# EAGLE board Rolllaeden_Stromversorgung (EAGLE 7.4.0)
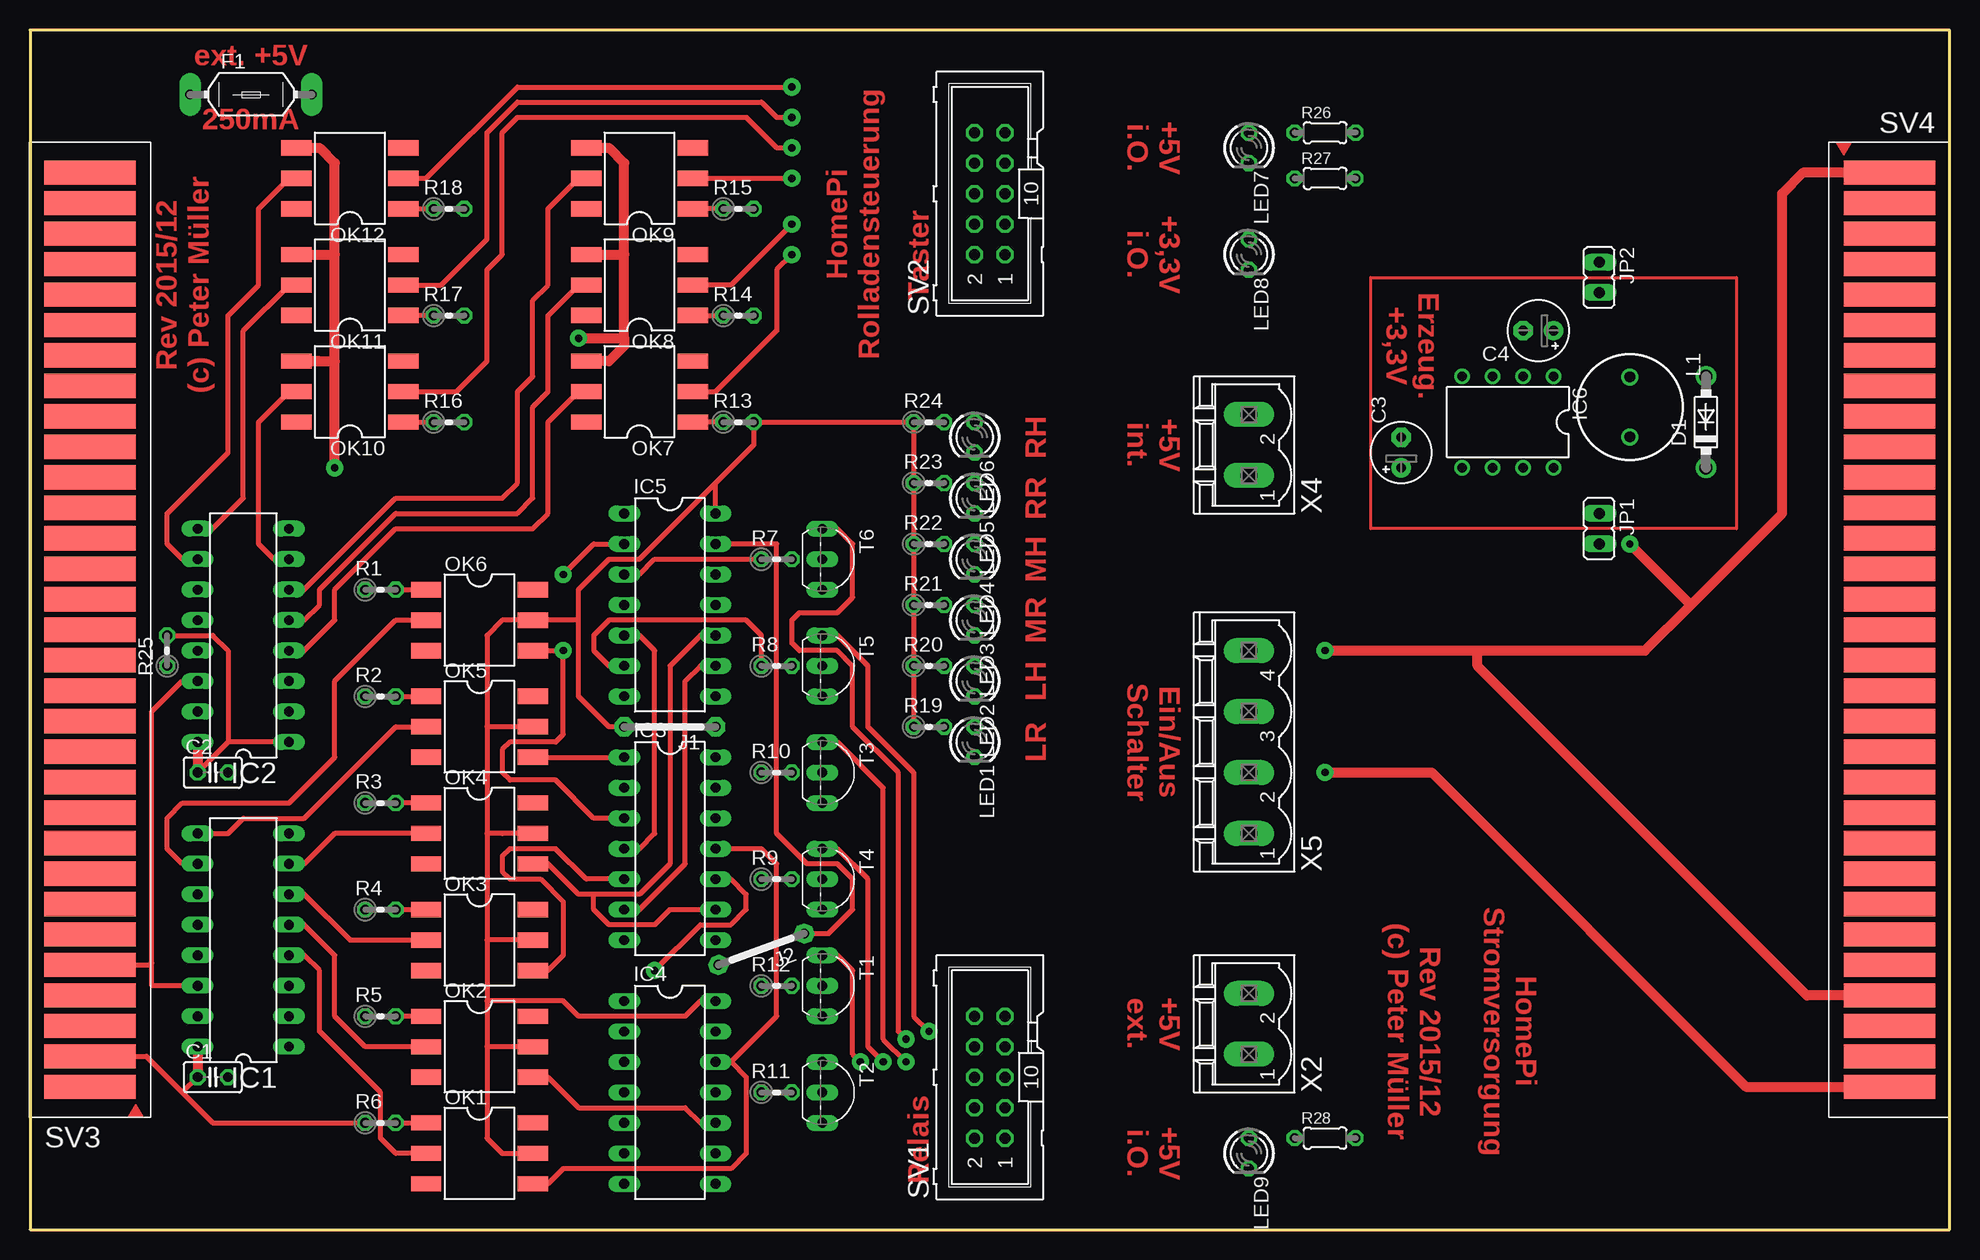
[diagram p0: board, top side]
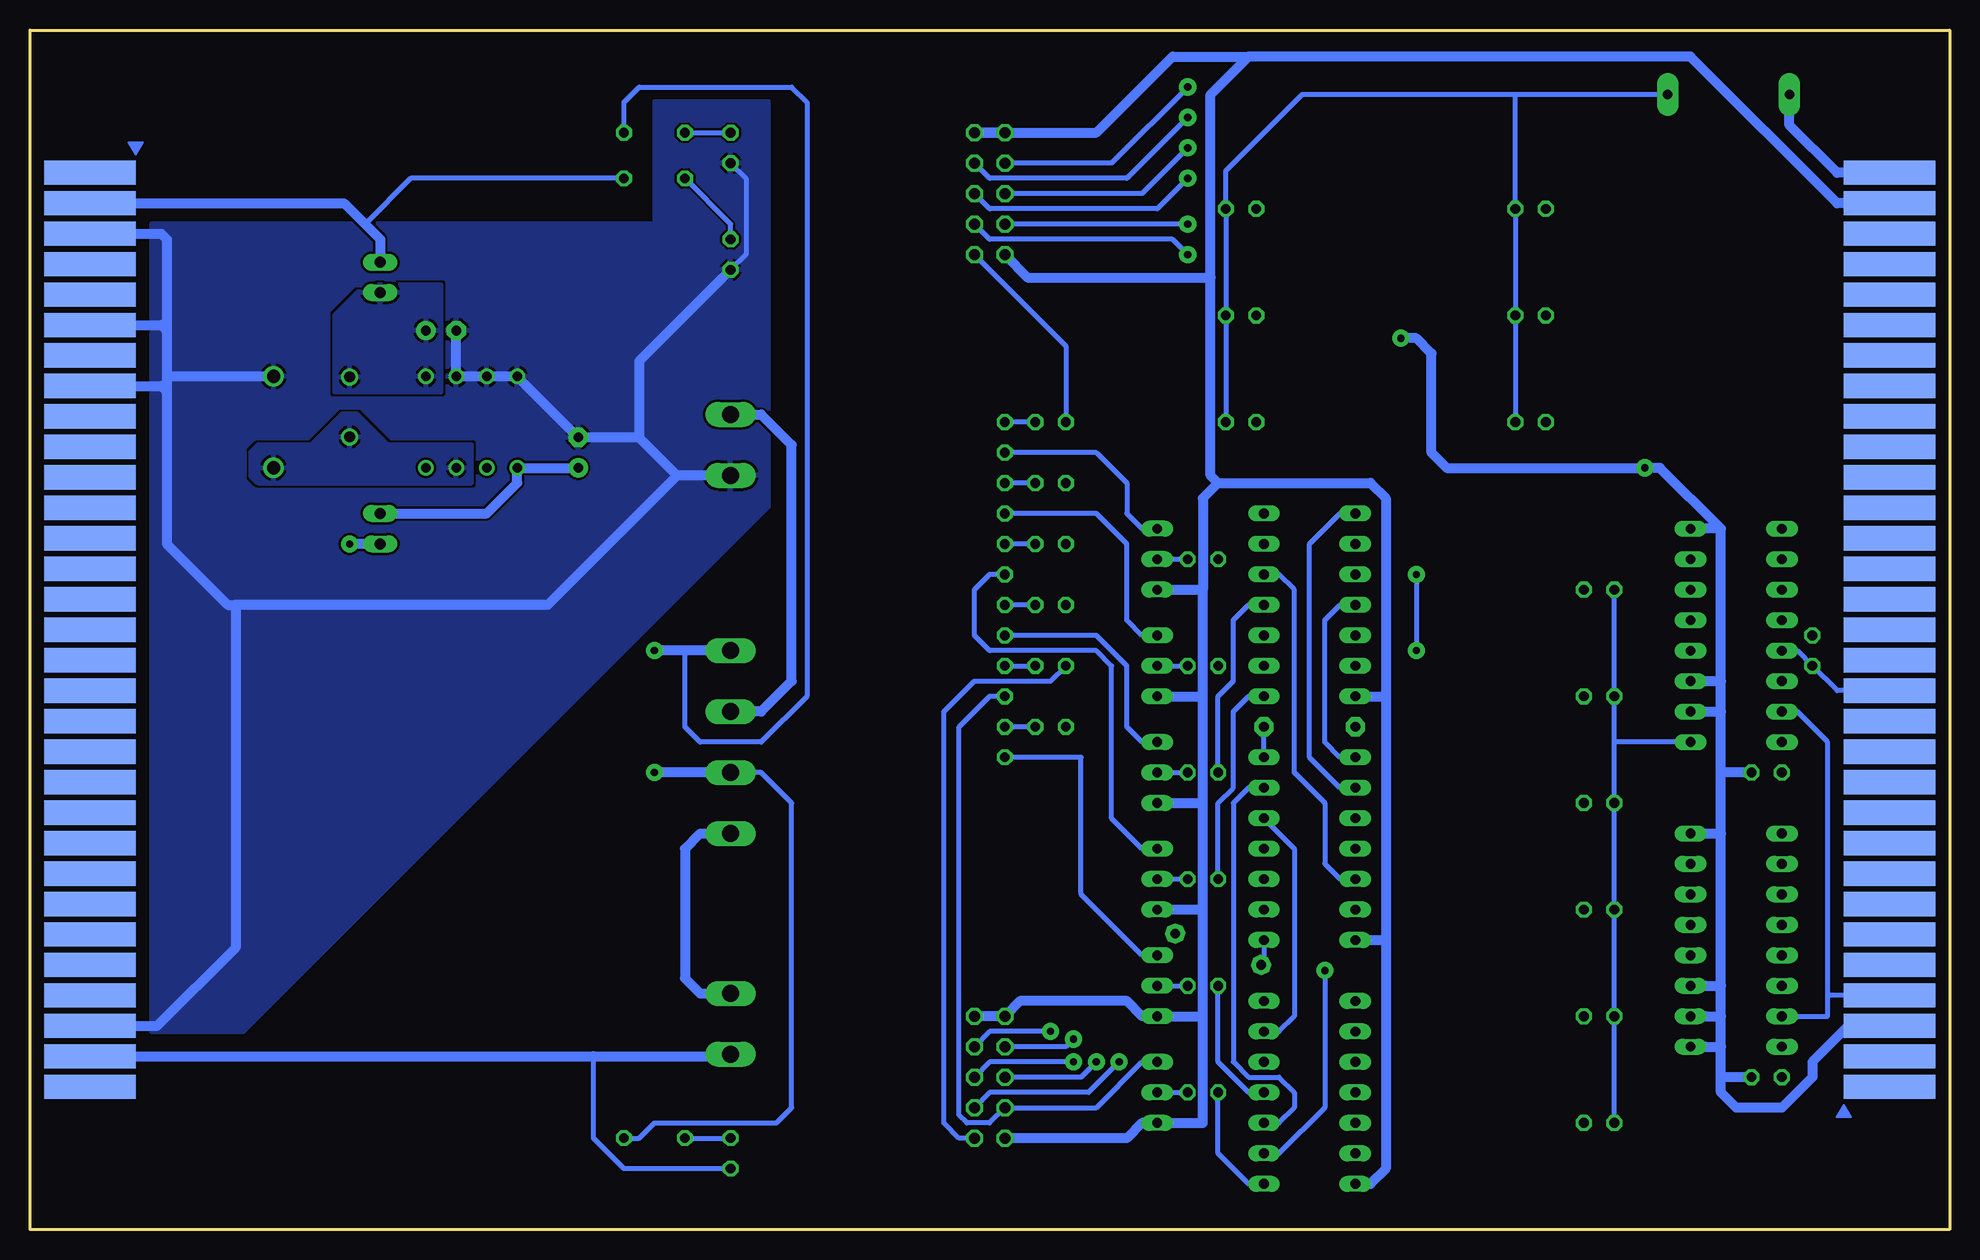
[diagram p1: board, bottom side, seen from below]

Size 160 x 100 mm. Coordinates in mm from the lower left corner, seen from the top.
Outline: 0,0 160,0 160,100 0,100 0,0
Copper layers (1*16): Top 0.035mm / dielectric 1.5mm / Bottom 0.035mm
Design rules "default *": minimum track width 10mil, minimum drill 24mil, track to track 0.2mm, track to pad 0.2mm, pad to pad 0.2mm, via to via 0.2mm, smd to smd 0.2mm, copper to edge 40mil, drill to drill 0.4mm, minimum pad ring 10mil, minimum via ring 8mil, stop-mask expansion 4mil, vias tented up to drill 0mil, thermal gap 10mil
Net classes: 1 gnd: width 0.61 mm

## Footprints (pad centres in the part's own frame; a part is rotated, then mirrored left to right if it is on the bottom)
C025-025X050 = drill 0.813 octagon: 1 -1.27,0; 2 1.27,0
E2,5-5 = drill 0.813 pad 1.6: + -1.27,0 | drill 0.813 pad 1.6 octagon: - 1.27,0
DO41-7.6 = drill 1.1 pad 1.7: A 3.81,0; C -3.81,0
LITTLEFUSE = drill 0.813 pad 1.778 long: 1 -5.08,0; 2 5.08,0
DIL16 = drill 0.813 long: 1 -8.89,-3.81; 2 -6.35,-3.81; 3 -3.81,-3.81; 4 -1.27,-3.81; 5 1.27,-3.81; 6 3.81,-3.81; 7 6.35,-3.81; 8 8.89,-3.81; 9 8.89,3.81; 10 6.35,3.81; 11 3.81,3.81; 12 1.27,3.81; 13 -1.27,3.81; 14 -3.81,3.81; 15 -6.35,3.81; 16 -8.89,3.81
DIL14 = drill 0.813 long: 1 -7.62,-3.81; 2 -5.08,-3.81; 3 -2.54,-3.81; 4 0,-3.81; 5 2.54,-3.81; 6 5.08,-3.81; 7 7.62,-3.81; 8 7.62,3.81; 9 5.08,3.81; 10 2.54,3.81; 11 0,3.81; 12 -2.54,3.81; 13 -5.08,3.81; 14 -7.62,3.81
DIL08 = drill 0.813 pad 1.27: 1 -3.81,-3.81; 2 -1.27,-3.81; 3 1.27,-3.81; 4 3.81,-3.81; 5 3.81,3.81; 6 1.27,3.81; 7 -1.27,3.81; 8 -3.81,3.81
07 = drill 0.813 pad 1.6 octagon: 1 -3.81,0; 2 3.81,0
JP1 = drill 0.914 long: 1 0,-1.27; 2 0,1.27
6000-XXXX-RC = drill 0.9 pad 1.422: 1 -2.5,0; 2 2.5,0
LED3MM = drill 0.813 octagon: A -1.27,0; K 1.27,0
DIL06_SMD = smd 1.27 x 2.54: 1 -2.54,-4.445; 2 0,-4.445; 3 2.54,-4.445; 4 2.54,4.445; 5 0,4.445; 6 -2.54,4.445
0204V = drill 0.813 octagon: 1 -1.27,0; 2 1.27,0
0204/5 = drill 0.813 octagon: 1 -2.54,0; 2 2.54,0
ML10 = drill 0.914 octagon: 1 -5.08,-1.27; 2 -5.08,1.27; 3 -2.54,-1.27; 4 -2.54,1.27; 5 0,-1.27; 6 0,1.27; 7 2.54,-1.27; 8 2.54,1.27; 9 5.08,-1.27; 10 5.08,1.27
PLATINENVERBINDER-31-SMD = smd 7.62 x 2.032 bottom: 1 0,-38.1; 2 0,-35.56; 3 0,-33.02; 4 0,-30.48; 5 0,-27.94; 6 0,-25.4; 7 0,-22.86; 8 0,-20.32; 9 0,-17.78; 10 0,-15.24; 11 0,-12.7; 12 0,-10.16; 13 0,-7.62; 14 0,-5.08; 15 0,-2.54; 16 0,0; 17 0,2.54; 18 0,5.08; 19 0,7.62; 20 0,10.16; 21 0,12.7; 22 0,15.24; 23 0,17.78; 24 0,20.32; 25 0,22.86; 26 0,25.4; 27 0,27.94; 28 0,30.48; 29 0,33.02; 30 0,35.56; 31 0,38.1 | smd 7.62 x 2.032: 1T 0,-38.1; 2T 0,-35.56; 3T 0,-33.02; 4T 0,-30.48; 5T 0,-27.94; 6T 0,-25.4; 7T 0,-22.86; 8T 0,-20.32; 9T 0,-17.78; 10T 0,-15.24; 11T 0,-12.7; 12T 0,-10.16; 13T 0,-7.62; 14T 0,-5.08; 15T 0,-2.54; 16T 0,0; 17T 0,2.54; 18T 0,5.08; 19T 0,7.62; 20T 0,10.16; 21T 0,12.7; 22T 0,15.24; 23T 0,17.78; 24T 0,20.32; 25T 0,22.86; 26T 0,25.4; 27T 0,27.94; 28T 0,30.48; 29T 0,33.02; 30T 0,35.56; 31T 0,38.1
TO92-CBE = drill 0.813 long: B 0,0; C -2.54,0; E 2.54,0
MSTBV2 = drill 1.397 long: 1 -2.54,0; 2 2.54,0
MSTBV4 = drill 1.397 long: 1 -7.62,0; 2 -2.54,0; 3 2.54,0; 4 7.62,0

## Placement (x,y rotation side)
C1  100nF  [C025-025X050]  15.24,12.7 0 top
C2  100nF  [C025-025X050]  15.24,38.1 0 top
C3  22µF 75V  [E2,5-5]  114.3,64.77 90 top
C4  220µF 25V  [E2,5-5]  125.73,74.93 180 top
D1  1N5819-B  [DO41-7.6]  139.7,67.31 90 top
F1  250mA  [LITTLEFUSE]  18.41,94.61 0 top
IC1  PCF8574P  [DIL16]  17.78,24.13 90 top
IC2  PCF8574P  [DIL16]  17.78,49.53 90 top
IC3  74HCT04N  [DIL14]  53.34,31.75 270 top
IC4  74HCT08N  [DIL14]  53.34,11.43 270 top
IC5  74HCT08N  [DIL14]  53.34,52.07 270 top
IC6  LM2574N-3.3  [DIL08]  123.19,67.31 180 top
J1  J7MM  [07]  53.34,41.91 180 top
J2  J7MM  [07]  60.96,23.37 200 top
JP1  [JP1]  130.81,58.42 180 top
JP2  [JP1]  130.81,79.38 180 top
L1  100µH  [6000-XXXX-RC]  133.35,68.58 270 top
LED1  rt 2mA  [LED3MM]  78.74,40.64 270 top
LED2  rt 2mA  [LED3MM]  78.74,45.72 270 top
LED3  rt 2mA  [LED3MM]  78.74,50.8 270 top
LED4  rt 2mA  [LED3MM]  78.74,55.88 270 top
LED5  rt 2mA  [LED3MM]  78.74,60.96 270 top
LED6  rt 2mA  [LED3MM]  78.74,66.04 270 top
LED7  [LED3MM]  101.6,90.17 270 top
LED8  [LED3MM]  101.6,81.28 270 top
LED9  [LED3MM]  101.6,6.35 270 top
OK1  CNY17SMD  [DIL06_SMD]  37.47,6.35 270 top
OK2  CNY17SMD  [DIL06_SMD]  37.47,15.24 270 top
OK3  CNY17SMD  [DIL06_SMD]  37.47,24.13 270 top
OK4  CNY17SMD  [DIL06_SMD]  37.47,33.02 270 top
OK5  CNY17SMD  [DIL06_SMD]  37.47,41.91 270 top
OK6  CNY17SMD  [DIL06_SMD]  37.47,50.8 270 top
OK7  CNY17SMD  [DIL06_SMD]  50.8,69.85 90 top
OK8  CNY17SMD  [DIL06_SMD]  50.8,78.74 90 top
OK9  CNY17SMD  [DIL06_SMD]  50.8,87.63 90 top
OK10  CNY17SMD  [DIL06_SMD]  26.67,69.85 90 top
OK11  CNY17SMD  [DIL06_SMD]  26.67,78.74 90 top
OK12  CNY17SMD  [DIL06_SMD]  26.67,87.63 90 top
R1  330  [0204V]  29.21,53.34 0 top
R2  330  [0204V]  29.21,44.45 0 top
R3  330  [0204V]  29.21,35.56 0 top
R4  330  [0204V]  29.21,26.67 0 top
R5  330  [0204V]  29.21,17.78 0 top
R6  330  [0204V]  29.21,8.89 0 top
R7  4k7  [0204V]  62.23,55.88 0 top
R8  4k7  [0204V]  62.23,46.99 0 top
R9  4k7  [0204V]  62.23,29.21 0 top
R10  4k7  [0204V]  62.23,38.1 0 top
R11  4k7  [0204V]  62.23,11.43 0 top
R12  4k7  [0204V]  62.23,20.32 0 top
R13  330  [0204V]  59.05,67.31 0 top
R14  330  [0204V]  59.05,76.2 0 top
R15  330  [0204V]  59.05,85.09 0 top
R16  330  [0204V]  34.92,67.31 0 top
R17  330  [0204V]  34.92,76.2 0 top
R18  330  [0204V]  34.92,85.09 0 top
R19  1k8  [0204V]  74.93,41.91 0 top
R20  1k8  [0204V]  74.93,46.99 0 top
R21  1k8  [0204V]  74.93,52.07 0 top
R22  1k8  [0204V]  74.93,57.15 0 top
R23  1k8  [0204V]  74.93,62.23 0 top
R24  1k8  [0204V]  74.93,67.31 0 top
R25  10k  [0204V]  11.43,48.26 90 top
R26  1k5  [0204/5]  107.95,91.44 0 top
R27  560  [0204/5]  107.95,87.63 0 top
R28  1k5  [0204/5]  107.95,7.62 0 top
SV1  [ML10]  80.01,12.7 90 top
SV2  [ML10]  80.01,86.36 90 top
SV3  PLATINENVERBINDER-31SMD  [PLATINENVERBINDER-31-SMD]  5,50 0 top
SV4  PLATINENVERBINDER-31SMD  [PLATINENVERBINDER-31-SMD]  155,50 180 top
T1  BC337-25  [TO92-CBE]  66.04,20.32 270 top
T2  BC337-25  [TO92-CBE]  66.04,11.43 270 top
T3  BC337-25  [TO92-CBE]  66.04,38.1 270 top
T4  BC337-25  [TO92-CBE]  66.04,29.21 270 top
T5  BC337-25  [TO92-CBE]  66.04,46.99 270 top
T6  BC337-25  [TO92-CBE]  66.04,55.88 270 top
X2  Power ext., 5V 1A  [MSTBV2]  101.6,17.14 90 top
X4  Power int., 5V 1A  [MSTBV2]  101.6,65.41 90 top
X5  MSTBV4  [MSTBV4]  101.6,40.64 90 top

## Library data of the parts
C1-C4 L1 R26-R28 = rcl
D1 = diode
F1 = fuse; OC_FARNELL: unknown; OC_NEWARK: unknown
IC1 IC2 = micro-philips; MPN: PCF8574PN; OC_FARNELL: 204020; OC_NEWARK: 11N8515
IC3-IC5 = 74xx-eu
IC6 = linear
J1 J2 JP1 JP2 = jumper
LED1-LED9 = led
OK1-OK12 SV3 SV4 = homepi
R1-R25 = resistor
SV1 SV2 = con-harting-ml; OC_FARNELL: unknown; OC_NEWARK: unknown
T1-T6 = transistor
X2 X4 = con-phoenix-508; MPN: MSTBV 2,5/2-GF-5.08; OC_FARNELL: 1792792; OC_NEWARK: 69R9845
X5 = con-phoenix-508; MPN: MSTBV 2,5/4-GF-5.08; OC_FARNELL: 1792794; OC_NEWARK: 69R9847

## Nets
+3,3V: JP2.1 R27.2 SV4.2 SV4.2T
+3,3V_INT_1: C4.+ IC6.1 JP2.2 L1.1
+3V3: C1.1 C2.1 IC1.16 IC2.1 IC2.16 R1.1 R2.1 R3.1 R4.1 R5.1 R6.1 R25.2 SV3.2 SV3.2T
+5V_EXT: R28.2 SV4.31 SV4.31T X5.2
+5V_INT: JP1.2 R26.2 SV4.1 SV4.1T SV4.28 SV4.28T X5.4
GND [gnd]: IC3.7 IC4.7 IC5.7 SV1.2 SV1.9 SV1.10 SV2.2 SV2.9 SV2.10 SV3.30 SV3.30T T1.E T2.E T3.E T4.E T5.E T6.E
GND_EXT: LED9.K SV4.30 SV4.30T X2.1
GND_INT: C3.- C4.- D1.A IC6.2 IC6.3 IC6.4 LED7.K LED8.K SV4.3 SV4.3T SV4.6 SV4.6T SV4.8 SV4.8T SV4.29 SV4.29T X4.1
GPIO.05: IC2.13 R25.1 SV3.14 SV3.14T
LM2574_IN: C3.+ IC6.5 JP1.1
LM2574_OUT: D1.C IC6.7 L1.2
N$1: OK5.1 R2.2
N$2: OK6.1 R1.2
N$3: R9.2 T4.B
N$4: IC3.3 IC5.2 OK6.4
N$5: OK8.2 SV2.4
N$6: IC5.3 R7.1
N$7: IC3.4 IC5.5
N$8: R10.2 T3.B
N$9: R8.2 T5.B
N$10: IC3.2 IC5.1
N$11: IC3.1 IC5.4 OK5.4
N$12: IC5.6 R8.1
N$13: OK2.1 R5.2
N$14: OK1.1 R6.2
N$15: LED1.A R19.2
N$16: IC1.9 OK5.2
N$17: OK4.1 R3.2
N$18: OK3.1 R4.2
N$19: OK7.1 R13.1
N$20: OK8.1 R14.1
N$21: OK7.2 SV2.3
N$22: IC3.9 IC5.10 OK4.4
N$23: IC3.5 IC5.12 OK3.4
N$24: IC3.8 J2.2
N$25: IC3.6 IC5.9
N$26: R7.2 T6.B
N$27: R11.2 T2.B
N$28: R12.2 T1.B
N$29: LED1.K SV1.3 T1.C
N$30: IC5.8 R9.1
N$31: IC5.11 R10.1
N$32: IC1.7 OK4.2
N$33: IC1.6 OK3.2
N$34: IC3.13 IC4.10 OK2.4
N$35: IC3.11 IC4.12 OK1.4
N$36: IC1.5 OK2.2
N$37: IC1.4 OK1.2
N$38: IC3.12 IC4.13
N$39: IC3.10 IC4.9
N$40: LED2.K SV1.4 T2.C
N$41: LED3.K SV1.5 T3.C
N$42: LED4.K SV1.6 T4.C
N$43: LED5.K SV1.7 T5.C
N$44: IC4.8 R11.1
N$45: IC4.11 R12.1
N$46: LED6.K SV1.8 T6.C
N$47: IC2.4 OK7.5
N$48: IC2.5 OK8.5
N$49: OK9.2 SV2.5
N$50: IC2.6 OK9.5
N$51: IC2.7 OK10.5
N$52: OK9.1 R15.1
N$53: OK10.1 R16.1
N$54: OK10.2 SV2.6
N$55: OK11.2 SV2.7
N$56: IC2.9 OK11.5
N$57: IC2.10 OK12.5
N$58: OK11.1 R17.1
N$59: OK12.1 R18.1
N$60: OK12.2 SV2.8
N$61: LED2.A R20.2
N$62: LED3.A R21.2
N$63: LED4.A R22.2
N$64: LED5.A R23.2
N$65: LED6.A R24.2
N$66: IC5.13 J2.1
N$67: IC3.14 J1.1
N$68: F1.1 SV3.31 SV3.31T
N$69: X5.1
N$71: LED7.A R26.1
N$72: LED8.A R27.1
N$73: LED9.A R28.1
N$75: X4.2 X5.3
N$99: IC1.10 OK6.2
PI_GND [gnd]: C1.2 C2.2 IC1.1 IC1.2 IC1.3 IC1.8 IC2.2 IC2.3 IC2.8 OK7.4 OK8.4 OK9.4 OK10.4 OK11.4 OK12.4 SV3.3 SV3.3T
SCL: IC1.14 IC2.14 SV3.5 SV3.5T
SDA: IC1.15 IC2.15 SV3.4 SV3.4T
VCC: F1.2 IC4.14 IC5.14 J1.2 OK1.5 OK2.5 OK3.5 OK4.5 OK5.5 OK6.5 R13.2 R14.2 R15.2 R16.2 R17.2 R18.2 R19.1 R20.1 R21.1 R22.1 R23.1 R24.1 SV1.1 SV2.1

## Tracks (layer width: path | path; a pad name or v marks a point on that pad's centre or on a via)
+3,3V
  Bottom 0.406: R27.2 128.27,87.63 132.08,83.82
  Bottom 0.813: SV4.2T 133.82,85.56 132.08,83.82 130.81,82.55 JP2.1
+3,3V_INT_1
  pour Bottom: 134.62,69.85 125.73,69.85 125.73,78.74 132.08,78.74 134.62,76.2
+3V3
  Top 0.406: R6.1 15.24,8.89 12.7,11.43 | IC2.1 16.51,40.64 | 16.51,40.64 C2.1 | 12.7,11.43 9.69,14.44 SV3.2T | C1.1 12.7,11.43 | R25.2 15.24,49.53 16.51,48.26 16.51,40.64
  Top 0.813: IC2.16 C2.1 | IC1.16 C1.1
  Bottom 0.406: R6.1 R5.1 R4.1 R3.1 27.94,40.64 | 27.94,40.64 R2.1 R1.1 | IC2.1 27.94,40.64
+5V_EXT  (via drill 0.6 pad 1.42)
  Top 0.813: SV4.31 143.04,11.9 116.84,38.1 v107.95,38.1
  Bottom 0.406: X5.2 99.06,38.1 96.52,35.56 96.52,10.16 97.79,8.89 107.95,8.89 109.22,7.62 R28.2
  Bottom 0.813: X5.2 v107.95,38.1
+5V_INT  (via drill 0.6 pad 1.42)
  Top 0.813: 138.43,52.07 134.62,48.26 120.65,48.26 | 138.43,52.07 146.05,59.69 146.05,86.36 147.79,88.1 SV4.1T | v133.35,57.15 138.43,52.07 | SV4.28T 148.12,19.52 120.65,46.99 120.65,48.26 | v107.95,48.26 120.65,48.26
  Bottom 0.406: R26.2 110.49,93.98 109.22,95.25 96.52,95.25 95.25,93.98 95.25,44.45 99.06,40.64 104.14,40.64 105.41,41.91 105.41,48.26
  Bottom 0.813: JP1.2 v133.35,57.15 | X5.4 105.41,48.26 v107.95,48.26
GND
  Bottom 0.813: SV2.10 SV2.9 71.12,91.44 64.77,97.79 58.42,97.79 | T6.E 62.23,53.34 | T5.E 62.23,44.45 | 62.23,44.45 62.23,53.34 | T3.E 62.23,35.56 | 62.23,35.56 62.23,44.45 | T4.E 62.23,26.67 | 62.23,26.67 62.23,35.56 | 62.23,17.78 T1.E 67.31,17.78 68.58,19.05 77.47,19.05 SV1.10 SV1.9 | 62.23,17.78 62.23,26.67 | 62.23,17.78 62.23,8.89 T2.E 67.31,8.89 68.58,7.62 SV1.2 | IC3.7 46.99,24.13 | 46.99,24.13 46.99,5.08 48.26,3.81 IC4.7 | IC5.7 46.99,44.45 | 46.99,44.45 46.99,24.13 | 58.42,97.79 21.59,97.79 9.36,85.56 SV3.30T | 60.96,62.23 62.23,60.96 62.23,53.34 | 60.96,62.23 48.26,62.23 46.99,60.96 46.99,44.45 | 60.96,62.23 61.59,62.87 61.59,79.38 | 61.59,79.38 61.59,94.61 58.42,97.79 | SV2.2 76.83,79.38 61.59,79.38
GND_EXT
  Bottom 0.406: LED9.K 110.49,5.08 113.03,7.62 113.03,14.44
  Bottom 0.813: SV4.30 113.03,14.44 101.77,14.44 X2.1
GND_INT
  Bottom 0.406: LED7.K 100.33,87.63 100.33,81.28 LED8.K
  Bottom 0.813: 142.88,52.07 116.84,52.07 106.05,62.87 | 142.88,52.07 143.51,52.07 148.59,57.15 148.59,69.85 | 142.88,52.07 142.88,23.5 149.39,16.98 SV4.29T | SV4.3T 149.06,83.02 148.59,82.55 148.59,74.93 | 148.59,74.93 148.59,71.12 | 148.59,71.12 148.59,69.85 | SV4.8T 149.06,70.32 148.59,69.85 | SV4.6T 149.06,75.4 148.59,74.93 | X4.1 106.05,62.87 | 106.05,62.87 109.22,66.04 | 109.22,66.04 C3.- IC6.4 IC6.3 IC6.2 C4.- | LED8.K 109.22,72.39 109.22,66.04 | D1.A 148.59,71.12
  pour Bottom (rank 6): 149.86,83.82 149.86,16.51 142.24,16.51 98.42,60.33 98.42,93.98 107.95,93.98 107.95,83.82
GPIO.05
  Bottom 0.406: IC2.13 12.7,48.26 R25.1 9.36,44.92 SV3.14T
LM2574_IN
  Bottom 0.813: JP1.1 121.92,59.69 119.38,62.23 IC6.5 C3.+
LM2574_OUT
  pour Bottom: 140.97,62.23 123.19,62.23 123.19,65.41 130.18,65.41 132.72,67.94 133.99,67.94 136.53,65.41 140.97,65.41 141.6,64.77 141.6,62.87
N$1
  Top 0.406: R2.2 OK5.1
N$2
  Top 0.406: R1.2 OK6.1
N$3
  Bottom 0.406: T4.B R9.2
N$4  (via drill 0.6 pad 1.42)
  Top 0.406: OK6.4 v44.45,48.26 44.45,41.27 43.81,40.64 40.01,40.64 39.37,40.01 39.37,38.1 40.01,37.47 43.81,37.47 46.99,34.29 IC3.3 | v44.45,54.61 46.99,57.15 IC5.2
  Bottom 0.406: v44.45,54.61 v44.45,48.26
N$5  (via drill 0.6 pad 1.42)
  Top 0.406: v63.5,83.82 58.42,78.74 OK8.2
  Bottom 0.406: v63.5,83.82 SV2.4
N$6
  Top 0.406: IC5.3 50.8,54.61 52.07,55.88 R7.1
N$7
  Top 0.406: IC3.4 50.8,31.75 52.07,33.02 52.07,48.26 50.8,49.53 IC5.5
N$8
  Bottom 0.406: T3.B R10.2
N$9
  Bottom 0.406: T5.B R8.2
N$10
  Bottom 0.406: IC3.2 50.8,36.83 53.34,39.37 53.34,57.15 50.8,59.69 IC5.1
N$11
  Top 0.406: OK5.4 IC3.1
  Bottom 0.406: IC3.1 50.8,39.37 52.07,40.64 52.07,50.8 50.8,52.07 IC5.4
N$12
  Top 0.406: R8.1 60.96,49.53 59.69,50.8 48.26,50.8 46.99,49.53 46.99,48.26 48.26,46.99 IC5.6
N$13
  Top 0.406: OK2.1 R5.2
N$14
  Top 0.406: R6.2 OK1.1
N$15
  Bottom 0.406: R19.2 LED1.A
N$16
  Top 0.406: IC1.9 16.51,33.02 17.78,34.29 22.86,34.29 30.48,41.91 OK5.2
N$17
  Top 0.406: OK4.1 R3.2
N$18
  Top 0.406: R4.2 OK3.1
N$19
  Top 0.406: R13.1 OK7.1
N$20
  Top 0.406: OK8.1 R14.1
N$21  (via drill 0.6 pad 1.42)
  Top 0.406: OK7.2 57.15,69.85 62.23,74.93 62.23,80.01 v63.5,81.28
  Bottom 0.406: SV2.3 80.01,82.55 64.77,82.55 v63.5,81.28
N$22
  Top 0.406: IC3.9 53.34,26.67 52.07,25.4 48.26,25.4 46.99,26.67 46.99,27.94 | IC5.10 55.88,49.53 53.34,46.99 53.34,30.48 50.8,27.94 46.99,27.94 | 46.99,27.94 45.72,27.94 43.18,30.48 OK4.4
N$23
  Top 0.406: IC3.5 46.35,29.21 43.81,31.75 40.01,31.75 39.37,31.11 39.37,29.84 40.01,29.21 42.55,29.21 44.45,27.3 44.45,22.86 43.18,21.59 OK3.4
  Bottom 0.406: IC3.5 50.8,29.21 52.07,30.48 52.07,35.56 54.61,38.1 54.61,53.34 55.88,54.61 IC5.12
N$24
  Bottom 0.406: IC3.8 57.15,22.3 J2.2
N$25
  Top 0.406: IC3.6 50.8,26.67 54.61,30.48 54.61,45.72 55.88,46.99 IC5.9
N$26
  Bottom 0.406: T6.B R7.2
N$27
  Bottom 0.406: T2.B R11.2
N$28
  Bottom 0.406: T1.B R12.2
N$29  (via drill 0.6 pad 1.42)
  Top 0.406: T1.C 67.31,22.86 68.58,21.59 68.58,14.61 v69.22,13.97
  Bottom 0.406: T1.C 67.31,22.86 72.39,27.94 72.39,39.37 LED1.K | v69.22,13.97 71.75,11.43 80.01,11.43 SV1.3
N$30
  Bottom 0.406: R9.1 60.96,35.56 59.69,36.83 59.69,43.18 58.42,44.45 IC5.8
N$31
  Bottom 0.406: R10.1 60.96,44.45 59.69,45.72 59.69,50.8 58.42,52.07 IC5.11
N$32
  Top 0.406: OK4.2 25.4,33.02 22.86,30.48 IC1.7
N$33
  Top 0.406: IC1.6 22.86,27.94 26.67,24.13 OK3.2
N$34
  Top 0.406: OK2.4 43.18,12.7 45.72,10.16 54.61,10.16 55.88,8.89 IC4.10
  Bottom 0.406: IC3.13 58.42,36.83 59.69,35.56 59.69,13.97 58.42,12.7 55.88,12.7 54.61,11.43 54.61,10.16 55.88,8.89 IC4.10
N$35
  Top 0.406: 58.42,13.97 62.23,17.78 62.23,30.48 60.96,31.75 IC3.11 | IC4.12 58.42,13.97 | 58.42,13.97 59.69,12.7 59.69,6.35 58.42,5.08 44.45,5.08 43.18,3.81 OK1.4
N$36
  Top 0.406: OK2.2 27.94,15.24 25.4,17.78 25.4,22.86 22.86,25.4 IC1.5
N$37
  Top 0.406: OK1.2 30.48,6.35 29.21,7.62 29.21,11.43 24.13,16.51 24.13,21.59 22.86,22.86 IC1.4
N$38
  Bottom 0.406: IC3.12 54.61,31.75 54.61,17.78 55.88,16.51 IC4.13
N$39  (via drill 0.6 pad 1.42)
  Top 0.406: v52.07,21.59 55.88,25.4 58.42,25.4 59.69,26.67 59.69,27.94 58.42,29.21 IC3.10
  Bottom 0.406: v52.07,21.59 52.07,10.16 55.88,6.35 IC4.9
N$40
  Bottom 0.406: T2.C 67.31,13.97 71.12,10.16 SV1.4 80.01,8.89 81.92,8.89 82.55,9.53 82.55,41.91 80.01,44.45 LED2.K
N$41  (via drill 0.6 pad 1.42)
  Top 0.406: T3.C 67.31,40.64 71.12,36.83 71.12,15.88 v73.03,13.97
  Bottom 0.406: T3.C 67.31,40.64 68.58,41.91 68.58,46.99 71.12,49.53 LED3.K | v73.03,13.97 80.01,13.97 SV1.5
N$42  (via drill 0.6 pad 1.42)
  Top 0.406: T4.C 67.31,31.75 69.85,29.21 69.85,15.24 v71.12,13.97
  Bottom 0.406: T4.C 67.31,31.75 69.85,34.29 69.85,46.99 71.12,48.26 80.01,48.26 81.28,49.53 81.28,53.34 80.01,54.61 LED4.K | v71.12,13.97 72.39,12.7 SV1.6
N$43  (via drill 0.6 pad 1.42)
  Top 0.406: T5.C 67.31,49.53 69.85,46.99 69.85,41.91 73.66,38.1 73.66,17.78 v74.93,16.51
  Bottom 0.406: T5.C 67.31,49.53 68.58,50.8 68.58,57.15 71.12,59.69 LED5.K | v74.93,16.51 80.01,16.51 SV1.7
N$44
  Bottom 0.406: IC4.8 58.42,3.81 60.96,6.35 R11.1
N$45
  Bottom 0.406: IC4.11 58.42,11.43 60.96,13.97 R12.1
N$46  (via drill 0.6 pad 1.42)
  Top 0.406: T6.C 67.31,58.42 68.58,57.15 68.58,52.7 67.31,51.44 64.14,51.44 63.5,50.8 63.5,48.9 64.14,48.26 67.31,48.26 68.58,46.99 68.58,41.91 72.39,38.1 72.39,16.51 v73.03,15.88
  Bottom 0.406: T6.C 67.31,58.42 68.58,59.69 68.58,62.23 71.12,64.77 LED6.K | SV1.8 73.66,15.24 v73.03,15.88
N$47
  Top 0.406: IC2.4 22.86,48.26 25.4,50.8 25.4,53.34 30.48,58.42 41.91,58.42 43.18,59.69 43.18,67.31 45.72,69.85 OK7.5
N$48
  Top 0.406: IC2.5 22.86,50.8 24.13,52.07 24.13,53.34 30.48,59.69 40.64,59.69 41.91,60.96 41.91,68.58 43.18,69.85 43.18,76.2 45.72,78.74 OK8.5
N$49  (via drill 0.6 pad 1.42)
  Top 0.406: OK9.2 v63.5,87.63
  Bottom 0.406: SV2.5 80.01,85.09 66.04,85.09 v63.5,87.63
N$50
  Top 0.406: IC2.6 22.86,53.34 30.48,60.96 39.37,60.96 40.64,62.23 40.64,69.85 41.91,71.12 41.91,77.47 43.18,78.74 43.18,85.09 45.72,87.63 OK9.5
N$51
  Top 0.406: IC2.7 20.32,55.88 19.05,57.15 19.05,67.31 21.59,69.85 OK10.5
N$52
  Top 0.406: R15.1 OK9.1
N$53
  Top 0.406: OK10.1 R16.1
N$54  (via drill 0.6 pad 1.42)
  Top 0.406: OK10.2 35.56,69.85 38.1,72.39 38.1,80.01 39.37,81.28 39.37,91.44 40.64,92.71 59.69,92.71 62.23,90.17 v63.5,90.17
  Bottom 0.406: v63.5,90.17 67.31,86.36 SV2.6
N$55  (via drill 0.6 pad 1.42)
  Top 0.406: OK11.2 34.29,78.74 38.1,82.55 38.1,91.44 40.64,93.98 60.96,93.98 62.23,92.71 v63.5,92.71
  Bottom 0.406: SV2.7 80.01,87.63 68.58,87.63 v63.5,92.71
N$56
  Top 0.406: IC2.9 15.24,58.42 17.78,60.96 17.78,74.93 21.59,78.74 OK11.5
N$57
  Top 0.406: IC2.10 12.7,55.88 11.43,57.15 11.43,59.69 16.51,64.77 16.51,76.2 19.05,78.74 19.05,85.09 21.59,87.63 OK12.5
N$58
  Top 0.406: R17.1 OK11.1
N$59
  Top 0.406: OK12.1 R18.1
N$60  (via drill 0.6 pad 1.42)
  Top 0.406: OK12.2 33.02,87.63 40.64,95.25 v63.5,95.25
  Bottom 0.406: v63.5,95.25 69.85,88.9 SV2.8
N$61
  Bottom 0.406: LED2.A R20.2
N$62
  Bottom 0.406: R21.2 LED3.A
N$63
  Bottom 0.406: R22.2 LED4.A
N$64
  Bottom 0.406: R23.2 LED5.A
N$65
  Bottom 0.406: R24.2 LED6.A
N$66
  Top 0.406: J2.1 66.58,24.67 68.58,26.67 68.58,29.21 67.31,30.48 64.77,30.48 62.23,33.02 62.23,57.15 IC5.13
N$67
  Bottom 0.406: IC3.14 J1.1
N$68
  Bottom 0.813: SV3.31T 9.36,88.1 13.34,92.08 F1.1
N$69
  Bottom 0.813: X5.1 104.14,33.02 105.41,31.75 105.41,20.95 104.14,19.68 101.6,19.68
N$71
  Bottom 0.406: R26.1 LED7.A
N$72
  Bottom 0.406: LED8.A 101.6,83.82 R27.1
N$73
  Bottom 0.406: R28.1 LED9.A
N$74
  Top 0.254: 142.24,58.42 111.76,58.42 111.76,79.38 142.24,79.38 142.24,58.42
N$75
  Bottom 0.813: X5.3 99.06,43.18 96.52,45.72 96.52,65.41 99.06,67.94 X4.2
N$99
  Top 0.406: IC1.10 12.7,30.48 11.43,31.75 11.43,34.29 12.7,35.56 21.59,35.56 25.4,39.37 25.4,45.72 30.48,50.8 OK6.2
PI_GND  (via drill 0.6 pad 1.42)
  Top 0.813: OK9.4 48.26,90.17 49.53,88.9 49.53,81.28 | OK12.4 24.13,90.17 25.4,88.9 25.4,81.28 | 24.13,72.39 OK10.4 25.4,72.39 | 49.53,74.3 49.53,81.28 | v25.4,63.5 25.4,72.39 | 25.4,72.39 25.4,81.28 | OK8.4 49.53,81.28 | OK11.4 25.4,81.28 | v45.72,74.3 49.53,74.3 | 49.53,74.3 49.53,73.66 48.26,72.39 OK7.4
  Bottom 0.813: 19.05,12.7 19.05,15.24 | 19.05,15.24 19.05,17.78 | 19.05,17.78 19.05,20.32 | 19.05,20.32 19.05,33.02 | 19.05,33.02 19.05,38.1 | 19.05,38.1 19.05,43.18 | 19.05,43.18 19.05,45.72 | 19.05,45.72 19.05,58.42 | 20.32,15.24 IC1.1 19.05,15.24 | 20.32,17.78 IC1.2 19.05,17.78 | 20.32,20.32 IC1.3 19.05,20.32 | 20.32,43.18 IC2.2 19.05,43.18 | C2.2 19.05,38.1 | 19.05,12.7 19.05,11.43 17.78,10.16 13.97,10.16 11.43,12.7 11.43,13.97 8.42,16.98 SV3.3T | C1.2 19.05,12.7 | 19.05,58.42 24.13,63.5 v25.4,63.5 41.91,63.5 43.18,64.77 43.18,73.03 44.45,74.3 v45.72,74.3 | IC2.3 19.05,45.72 | IC1.8 19.05,33.02 | 19.05,58.42 IC2.8
SCL
  Top 0.406: IC1.14 10.16,20.32 10.16,22.23 | 10.16,22.23 10.16,43.18 12.7,45.72 IC2.14 | SV3.5T 9.99,22.06 10.16,22.23
SDA
  Bottom 0.406: IC1.15 10.16,17.78 10.16,19.68 | 10.16,19.68 10.16,40.64 12.7,43.18 IC2.15 | SV3.4T 9.99,19.52 10.16,19.68
VCC
  Top 0.406: R19.1 R20.1 R21.1 R22.1 R23.1 R24.1 R13.2 60.33,65.41 57.15,62.23 | 45.72,50.8 OK6.5 39.37,50.8 38.1,49.53 38.1,41.91 | 38.1,41.91 38.1,33.02 | 38.1,33.02 38.1,24.13 | 38.1,24.13 38.1,19.05 | 38.1,19.05 38.1,15.24 | 38.1,15.24 38.1,7.62 39.37,6.35 OK1.5 | 39.37,33.02 OK4.5 38.1,33.02 | 39.37,41.91 OK5.5 38.1,41.91 | J1.2 48.26,41.91 45.72,44.45 45.72,50.8 | IC4.14 55.88,19.05 54.61,17.78 45.72,17.78 44.45,19.05 38.1,19.05 | OK2.5 38.1,15.24 | OK3.5 38.1,24.13 | 45.72,50.8 45.72,53.34 48.26,55.88 50.8,55.88 57.15,62.23 | IC5.14 57.15,62.23
  Bottom 0.406: R13.2 R14.2 R15.2 60.33,88.27 53.98,94.61 36.2,94.61 | R16.2 R17.2 R18.2 36.2,94.61 | SV2.1 73.66,73.66 R24.1 | SV1.1 82.55,7.62 83.82,8.89 83.82,43.18 81.28,45.72 74.93,45.72 R20.1 | F1.2 36.2,94.61

## Text on the board
Top: ext. +5V / / 250mA | +5V / i.O. | HomePi / Rolladensteuerung | +3,3V / i.O. | Rev 2015/12 / (c) Peter Müller | Taster | Erzeug. / +3,3V | RH | +5V / int. | RR | MH | MR | LH | LR | Ein/Aus / Schalter | +5V / ext. | HomePi / Stromversorgung / / Rev 2015/12 / (c) Peter Müller | +5V / i.O. | Relais
Document: Bitte hier schneiden.